# Altium PCB ДФТВ.434519.003.101.PcbDoc (part 1 of 3)
Units mm, origin at the board's own origin, x right, y up, seen from the top; angles counter-clockwise.
Board outline 82.5 x 70 mm, 2 copper layers (Top Layer, Bottom Layer), stack 1.491 mm thick; 90 components, 67 nets, 446 pads, 341 vias.
Unrouted connection lines stored in the file: 55.
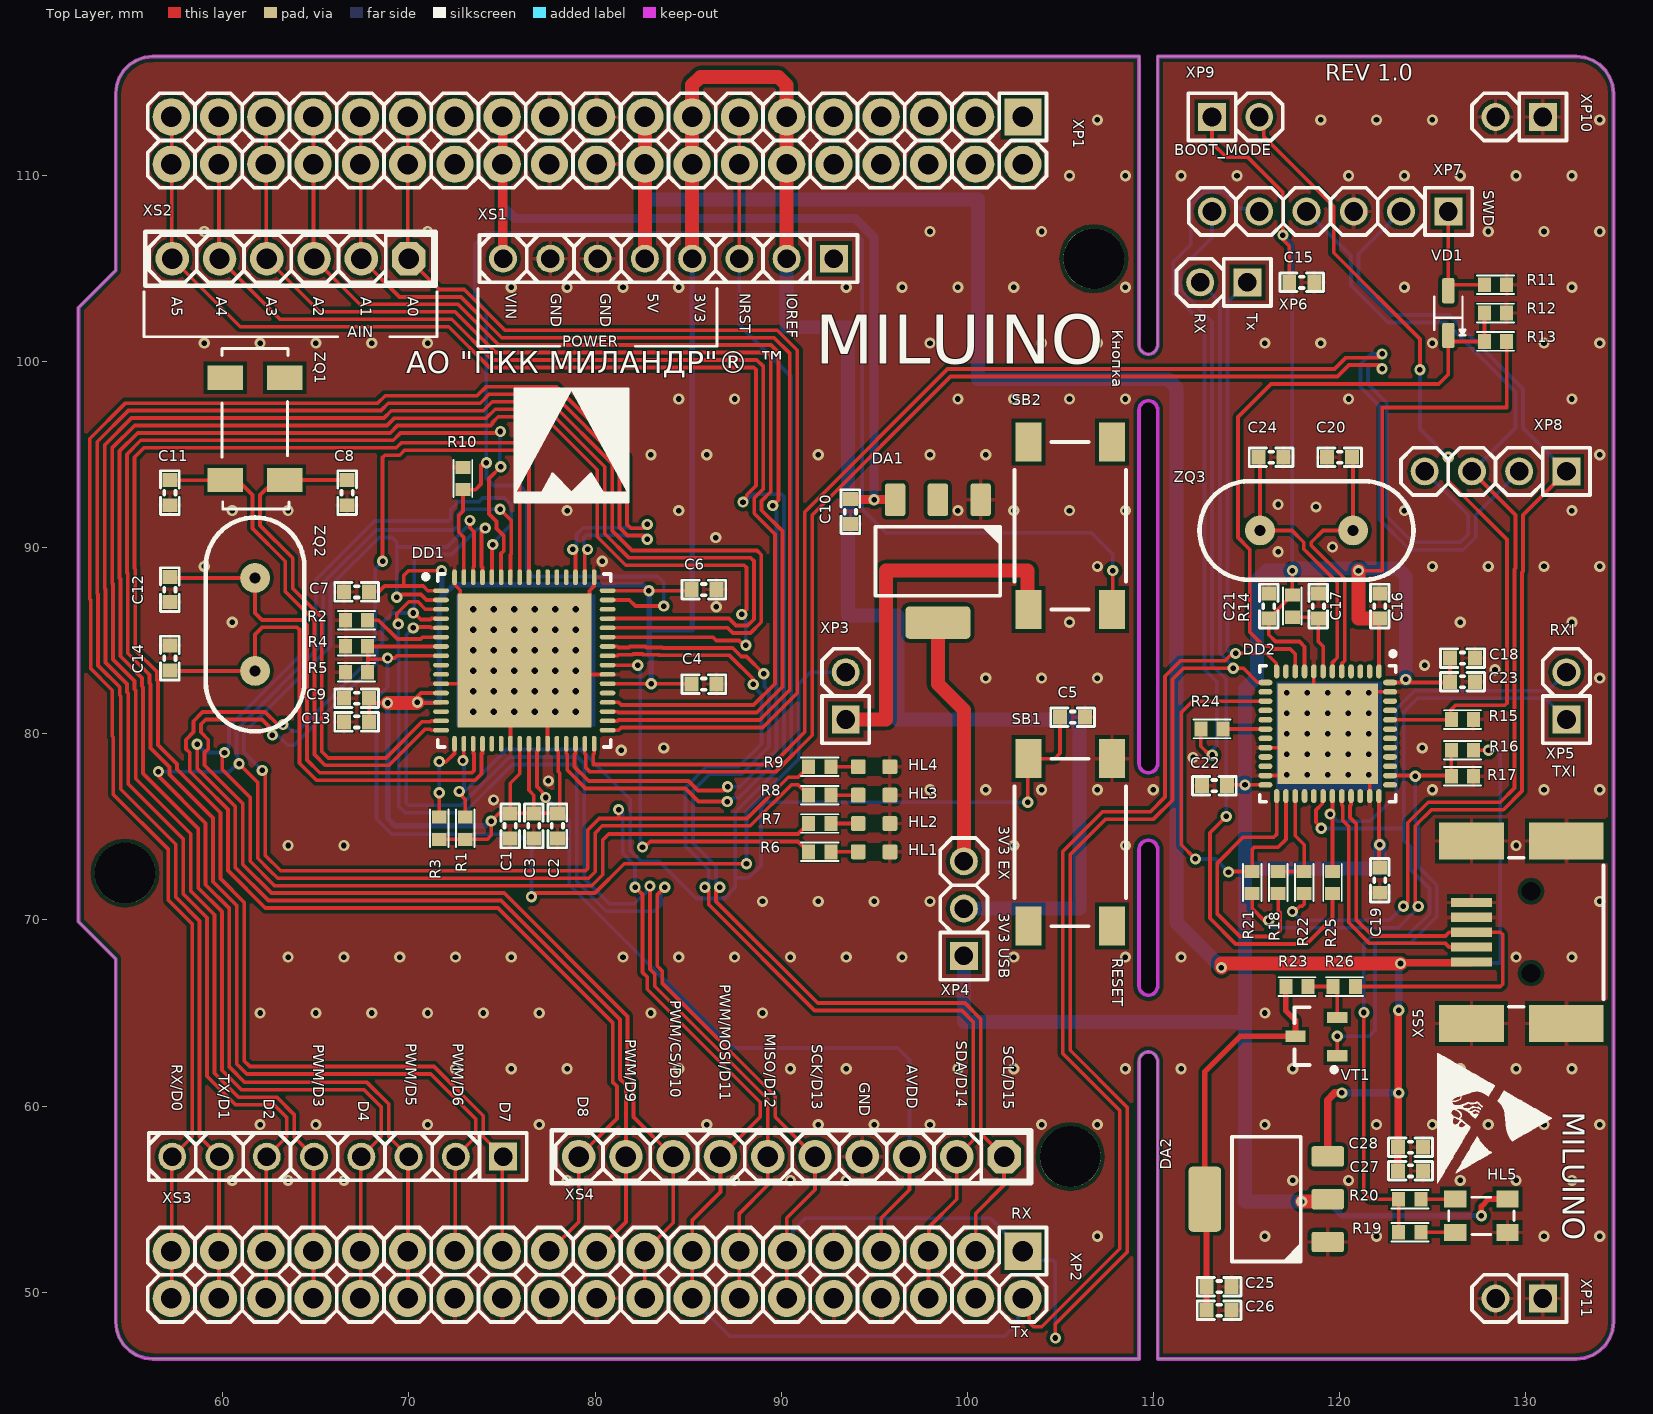
[diagram p0: Top Layer view]
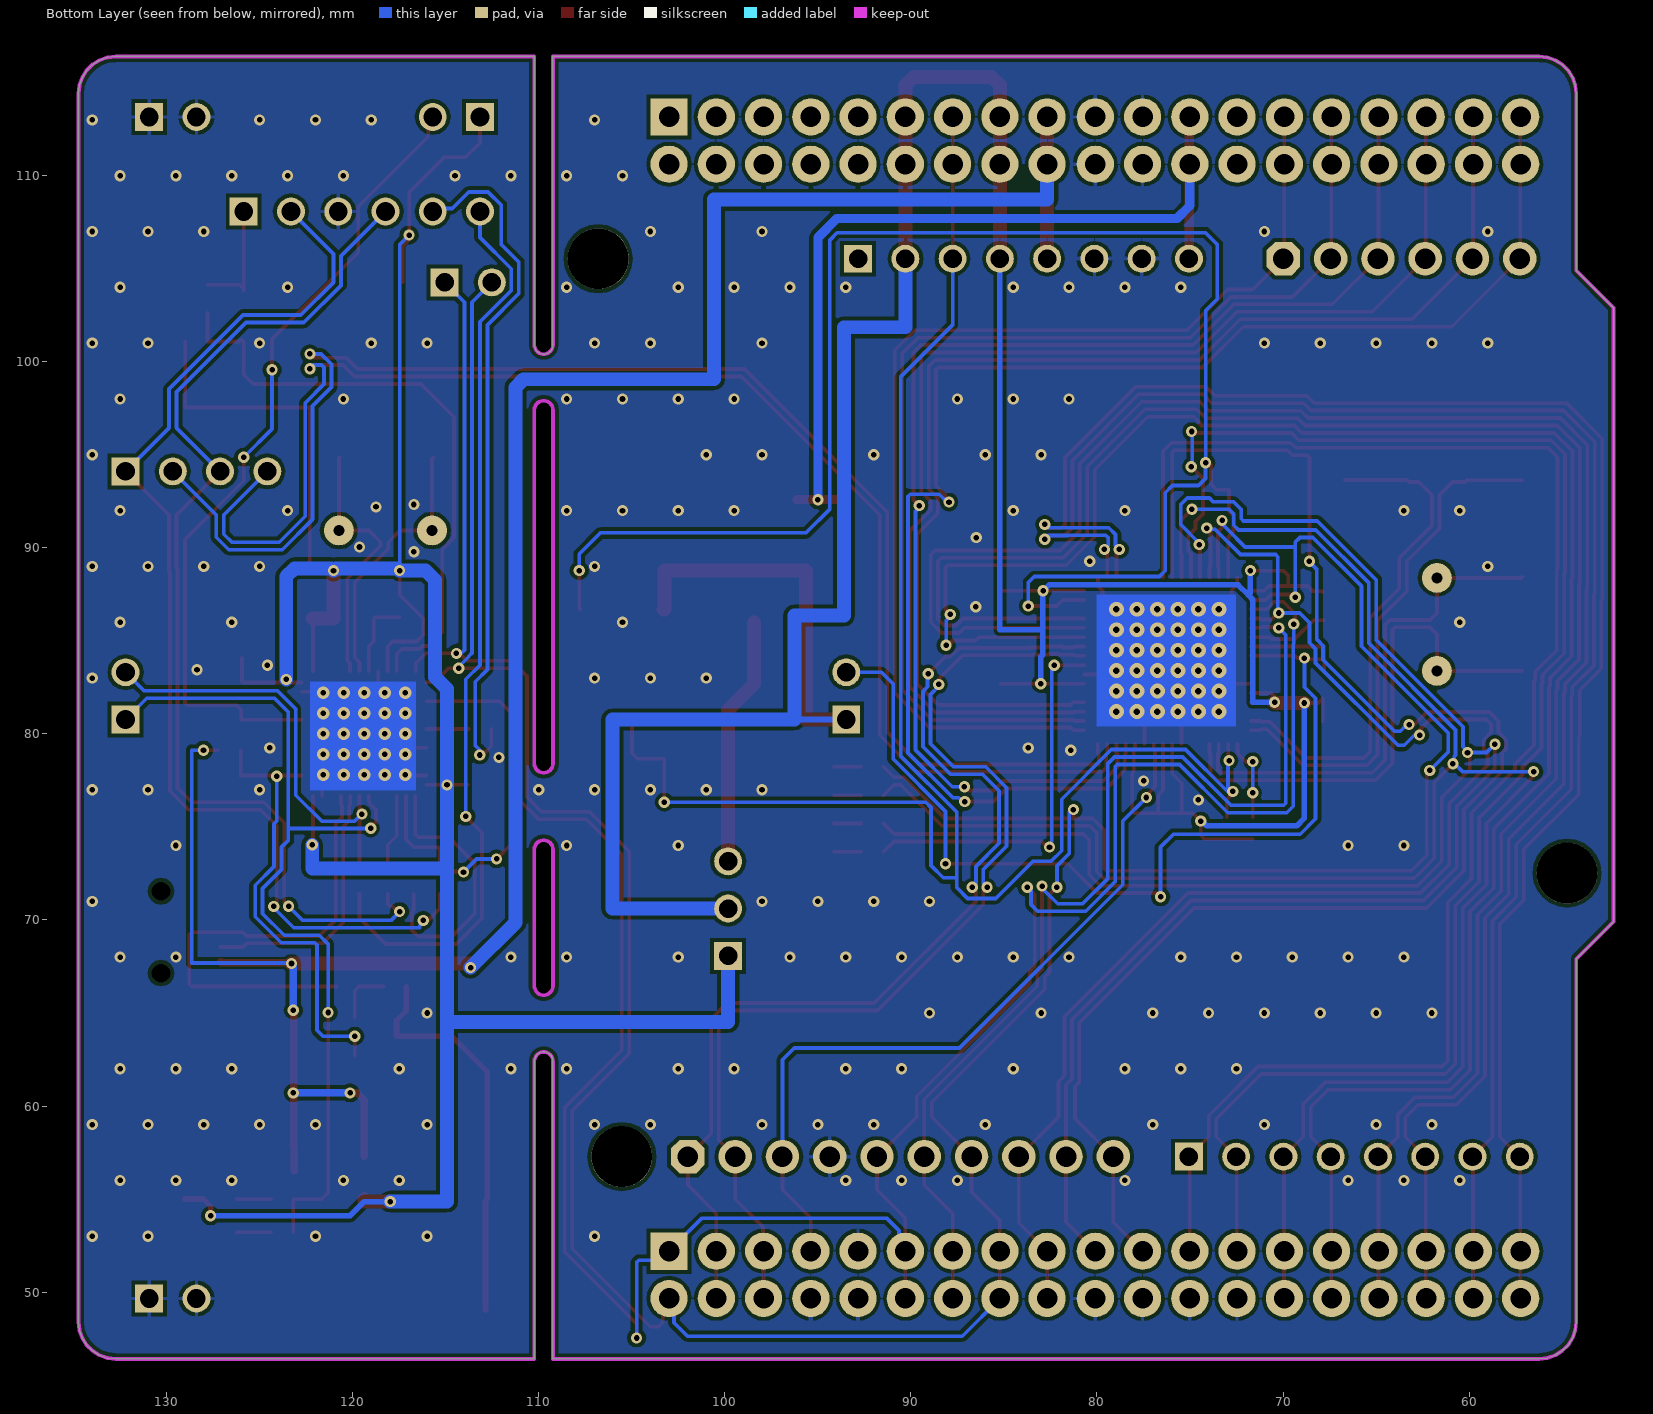
[diagram p1: Bottom Layer view, seen from below]
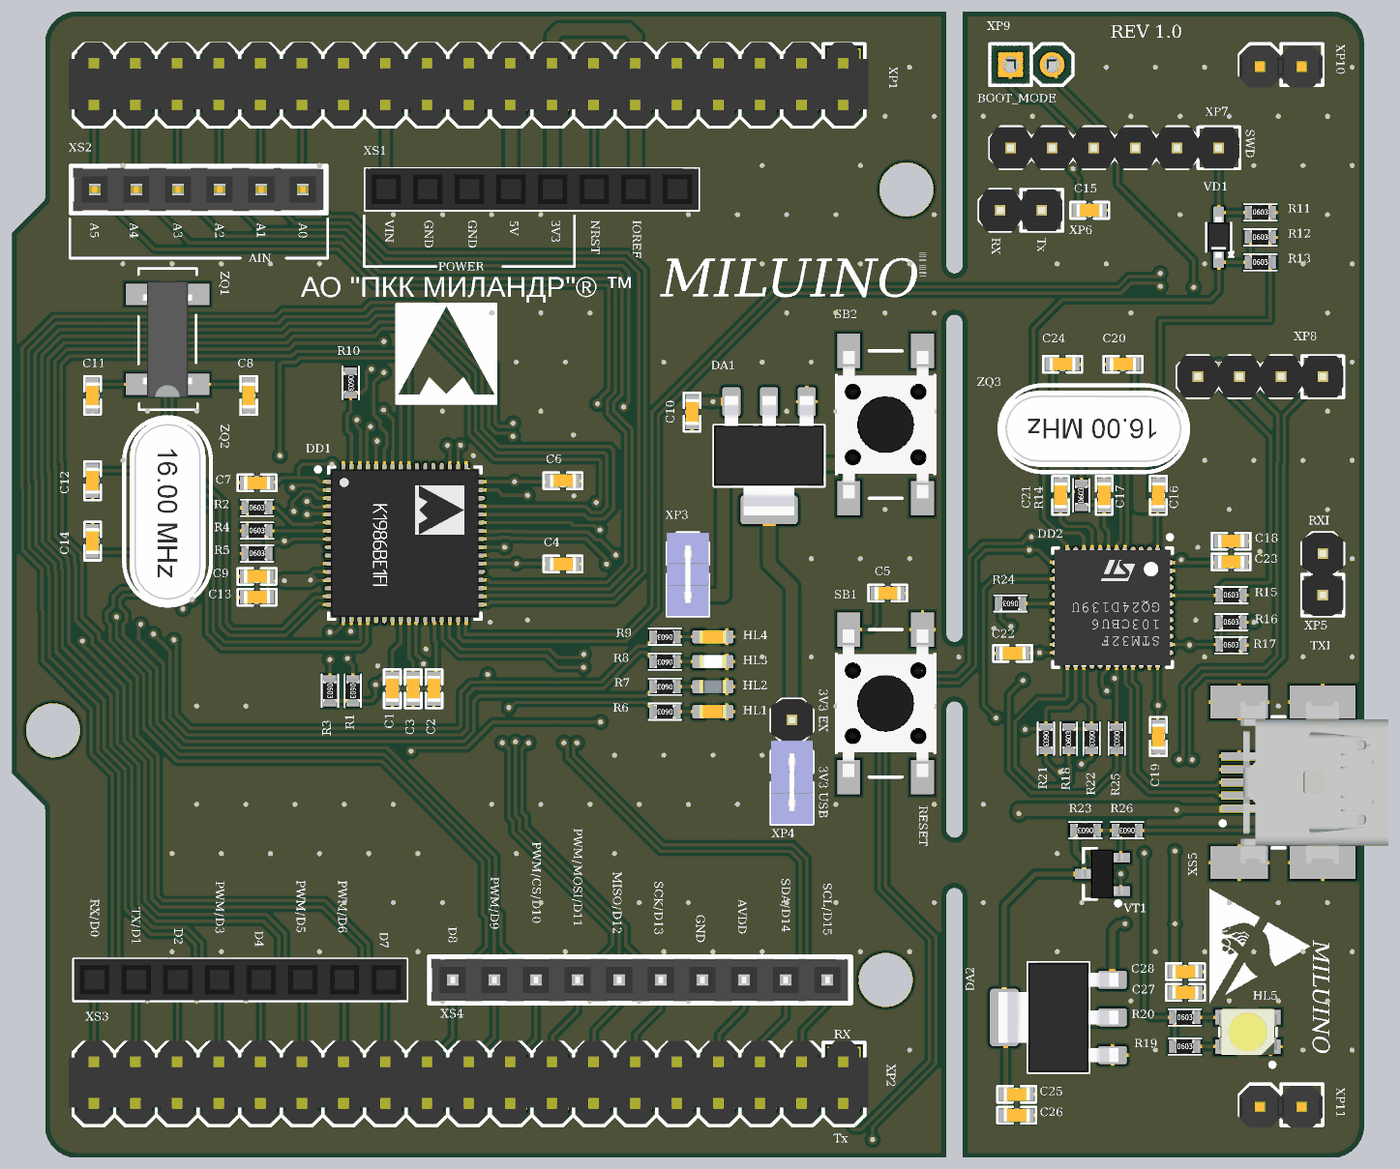
[diagram p3: 3D render of the assembled board from above, using the file's embedded part models]

## Layer stack, top to bottom
Top Solder: solder mask 0.0102, Solder Resist, Dk 3.5
Top Layer: signal copper 0.0356
Dielectric 1: dielectric 1.42, FR-4, Dk 4.8
Bottom Layer: signal copper 0.0356
Bottom Solder: solder mask 0.0102, Solder Resist, Dk 3.5

## Board outline
132.737,46.407 133.182,46.457 133.605,46.605 133.984,46.843 134.301,47.16 134.539,47.539 134.687,47.962 134.737,48.407 134.737,114.407 134.687,114.852 134.539,115.275 134.301,115.654 133.984,115.971 133.605,116.209 133.182,116.357 132.737,116.407 110.237,116.407 110.237,100.907 110.226,100.803 110.194,100.704 110.142,100.613 110.072,100.535 109.987,100.474 109.892,100.431 109.789,100.41 109.685,100.41 109.582,100.431 109.487,100.474 109.402,100.535 109.332,100.613 109.28,100.704 109.248,100.803 109.237,100.907 109.237,116.407 56.237,116.407 55.792,116.357 55.369,116.209 54.99,115.971 54.673,115.654 54.435,115.275 54.287,114.852 54.237,114.407 54.237,104.907 52.237,102.907 52.237,69.907 54.237,67.907 54.237,48.407 54.287,47.962 54.435,47.539 54.673,47.16 54.99,46.843 55.369,46.605 55.792,46.457 56.237,46.407 109.237,46.407 109.237,62.407 109.248,62.511 109.28,62.61 109.332,62.701 109.402,62.779 109.487,62.84 109.582,62.883 109.685,62.904 109.789,62.904 109.892,62.883 109.987,62.84 110.072,62.779 110.142,62.701 110.194,62.61 110.226,62.511 110.237,62.407 110.237,46.407
cut-out: 109.892,74.263 109.987,74.22 110.072,74.159 110.142,74.081 110.194,73.99 110.226,73.891 110.237,73.787 110.237,66.457 110.226,66.353 110.194,66.254 110.142,66.163 110.072,66.085 109.987,66.024 109.892,65.981 109.789,65.96 109.685,65.96 109.582,65.981 109.487,66.024 109.402,66.085 109.332,66.163 109.28,66.254 109.248,66.353 109.237,66.457 109.237,73.787 109.248,73.891 109.28,73.99 109.332,74.081 109.402,74.159 109.487,74.22 109.582,74.263 109.685,74.284 109.789,74.284
cut-out: 109.892,97.883 109.987,97.84 110.072,97.779 110.142,97.701 110.194,97.61 110.226,97.511 110.237,97.407 110.237,78.407 110.226,78.303 110.194,78.204 110.142,78.113 110.072,78.035 109.987,77.974 109.892,77.931 109.789,77.91 109.685,77.91 109.582,77.931 109.487,77.974 109.402,78.035 109.332,78.113 109.28,78.204 109.248,78.303 109.237,78.407 109.237,97.407 109.248,97.511 109.28,97.61 109.332,97.701 109.402,97.779 109.487,97.84 109.582,97.883 109.685,97.904 109.789,97.904

## Design rules (kind name [scope] priority, off if disabled: settings)
Clearance [All] p1: gap=0.2 ignorepadtopadclearanceinfootprint=FALSE
HoleSize [All] p1: absolutevalues=TRUE maxlimit=0.3 minlimit=0.3 maxpercent=80.000 minpercent=20.000
PlaneConnect [All] p1: planeconnectstyle=Relief reliefexpansion=0.5 reliefentries=4 reliefconductorwidth=0.2 reliefairgap=0.2
PolygonConnect [All] p1: connectstyle=Relief reliefconductorwidth=0.2 reliefentries=4 polygonreliefangle="90 Angle" airgapwidth=0.2
RoutingVias [All] p1: holewidth=0.3 width=0.6 viastyle="Through Hole" minholewidth=0.3 minwidth=0.6 maxholewidth=0.3 maxwidth=0.6 useviatemplates=TRUE viatemplateguid#1={6A73DFBB-D338-4014-9EBD-422A7596DFE0} viatemplatename#1=v60h30m0mx0(1)
SolderMaskExpansion [All] p1: expansion=0.1 istentingtop=FALSE
Width B2_Power [InNet('B2')] p1: maxlimit=0.5 minlimit=0.5 preferedwidth=0.5
Width Width_3,3В [InNet('+3,3В')] p2: maxlimit=0.75 minlimit=0.2 preferedwidth=0.3
Width Width_3,3В_In [InNet('+3,3В_In')] p3: maxlimit=0.75 minlimit=0.2 preferedwidth=0.3
Width Width_3,3В_Ex [InNet('+3,3В_Ex')] p4: maxlimit=0.75 minlimit=0.2 preferedwidth=0.3
Width Width_5В [InNet('+5В')] p5: maxlimit=0.75 minlimit=0.2 preferedwidth=0.4
Width [All] p6: maxlimit=0.2 minlimit=0.2 preferedwidth=0.2
28 further rules are at their usual default settings.

## Classes and differential pairs
component class "ДФТВ.434519.003 л.2 Э3": C15 C16 C17 C18 C19 C20 C21 C22 C23 C24 C25 C26 C27 C28 DA2 HL5 R11 R12 R13 R14 R15 R16 R17 R18 R19 R20 R21 R22 R23 R24 R25 R26 VD1 VT1 XP4 XP5 XP6 XP7 XP8 XP9 XP10 XP11 XS5 ZQ3
component class "ДФТВ.434519.003 л.1 Э3": C1 C2 C3 C4 C5 C6 C7 C8 C9 C10 C11 C12 C13 C14 DA1 HL1 HL2 HL3 HL4 R1 R2 R3 R4 R5 R6 R7 R8 R9 R10 SB1 SB2 XP1 XP2 XP3 XS1 XS2 XS3 XS4 ZQ1 ZQ2

## Components (designator, comment, footprint, x,y, rotation, side; value= is the part's Value field where it differs from the comment)
C1 "Конденсатор" SMD_C0603 75.438,75.057 r90 top value="0.1 мкФ"
C2 "Конденсатор" SMD_C0603 77.978,75.057 r90 top value="0.1 мкФ"
C3 "Конденсатор" SMD_C0603 76.708,75.057 r90 top value="0.1 мкФ"
C4 "Конденсатор" SMD_C0603 85.852,82.677 r180 top value="0.1 мкФ"
C5 "Конденсатор" SMD_C0603 105.664,80.899 r0 top value="0.1 мкФ"
C6 "Конденсатор" SMD_C0603 85.852,87.757 r180 top value="0.1 мкФ"
C7 "Конденсатор" SMD_C0603 67.183,87.63 r0 top value="0.1 мкФ"
C8 "Конденсатор" SMD_C0603 66.675,92.964 r90 top value="24 пФ"
C9 "Конденсатор" SMD_C0603 67.183,81.915 r0 top value="0.1 мкФ"
C10 "Конденсатор" SMD_C0603 93.726,91.948 r90 top value="0.1 мкФ"
C11 "Конденсатор" SMD_C0603 57.15,92.964 r90 top value="24 пФ"
C12 "Конденсатор" SMD_C0603 57.15,87.757 r90 top value="24 пФ"
C13 "Конденсатор" SMD_C0603 67.183,80.645 r0 top value="0.1 мкФ"
C14 "Конденсатор" SMD_C0603 57.15,84.074 r270 top value="24 пФ"
C15 "Конденсатор" SMD_C0603 117.983,104.267 r180 top value="0.1 мкФ"
C16 "Конденсатор" SMD_C0603 122.174,86.868 r270 top value="0.1 мкФ"
C17 "Конденсатор" SMD_C0603 118.872,86.868 r270 top value="0.1 мкФ"
C18 "Конденсатор" SMD_C0603 126.619,84.074 r180 top value="0.1 мкФ"
C19 "Конденсатор" SMD_C0603 122.174,72.136 r90 top value="0.1 мкФ"
C20 "Конденсатор" SMD_C0603 120.015,94.869 r0 top value="24 пФ"
C21 "Конденсатор" SMD_C0603 116.205,86.868 r270 top value="0.1 мкФ"
C22 "Конденсатор" SMD_C0603 113.284,77.216 r0 top value="0.1 мкФ"
C23 "Конденсатор" SMD_C0603 126.619,82.804 r180 top value="0.1 мкФ"
C24 "Конденсатор" SMD_C0603 116.332,94.869 r180 top value="24 пФ"
C25 "Конденсатор" SMD_C0603 113.538,50.292 r180 top value="0.1 мкФ"
C26 "Конденсатор" SMD_C0603 113.538,49.022 r180 top value="0.1 мкФ"
C27 "Конденсатор" SMD_C0603 123.825,56.515 r180 top value="0.1 мкФ"
C28 "Конденсатор" SMD_C0603 123.825,57.785 r180 top value="0.1 мкФ"
DA1 "Преобразователи напряжения" SOT223 98.425,89.281 r270 top
DA2 "Преобразователи напряжения" SOT223 116.078,54.991 r180 top
DD1 "Comment" MDR-QFN64_N 76.2,83.947 r0 top
DD2 "Comment" UFQFPN48 119.38,80.01 r270 top
HL1 "Светодиод" "DIODE: LED-0603-AMBER" 94.996,73.66 r0 top value="2.1 V"
HL2 "Светодиод" "DIODE: LED-0603-BLUE" 94.996,75.184 r0 top value="2.1 V"
HL3 "Светодиод" "DIODE: LED-0603-WHITE" 94.996,76.708 r0 top value="2.1 V"
HL4 "Светодиод" "DIODE: LED-0603-YELLOW" 94.996,78.232 r0 top value="2.1 V"
HL5 "Светодиод" "DIODE: LED 3528" 127.635,54.102 r0 top value="2.1 V"
R1 "Резистор" R0603 73.025,74.93 r270 top value="10 кОм"
R2 "Резистор" R0603 67.183,86.106 r0 top value="10 кОм"
R3 "Резистор" R0603 71.628,74.93 r270 top value="10 кОм"
R4 "Резистор" R0603 67.183,84.709 r0 top value="10 кОм"
R5 "Резистор" R0603 67.183,83.312 r0 top value="10 кОм"
R6 "Резистор" R0603 92.075,73.66 r180 top value="330 Ом"
R7 "Резистор" R0603 92.075,75.184 r180 top value="330 Ом"
R8 "Резистор" R0603 92.075,76.708 r180 top value="330 Ом"
R9 "Резистор" R0603 92.075,78.232 r180 top value="330 Ом"
R10 "Резистор" R0603 72.898,93.726 r270 top value="330 Ом"
R11 "Резистор" R0603 128.397,104.14 r0 top value="10 кОм"
R12 "Резистор" R0603 128.397,102.616 r0 top value="4.7 кОм"
R13 "Резистор" R0603 128.397,101.092 r0 top value="4.7 кОм"
R14 "Резистор" R0603 117.475,86.868 r90 top value="10 кОм"
R15 "Резистор" R0603 126.619,80.772 r0 top value="10 кОм"
R16 "Резистор" R0603 126.619,79.121 r0 top value="10 кОм"
R17 "Резистор" R0603 126.619,77.724 r0 top value="10 кОм"
R18 "Резистор" R0603 116.713,72.009 r90 top value="220 Ом"
R19 "Резистор" R0603 123.79,53.213 r0 top value=100
R20 "Резистор" R0603 123.79,54.991 r0 top value=100
R21 "Резистор" R0603 115.316,72.009 r270 top value="22 Ом"
R22 "Резистор" R0603 118.11,72.009 r270 top value="22 Ом"
R23 "Резистор" R0603 117.729,66.421 r180 top value="1.5 кОм"
R24 "Резистор" R0603 113.157,80.264 r180 top value="22 Ом"
R25 "Резистор" R0603 119.634,72.009 r270 top value="22 Ом"
R26 "Резистор" R0603 120.269,66.421 r180 top value="1.5 кОм"
SB1 "Переключатель" "BUT: 6x6 SMD" 105.537,74.168 r270 top
SB2 "Переключатель" "BUT: 6x6 SMD" 105.537,91.186 r90 top
VD1 "Диод Шоттки" "DIODE: SOD323F" 125.857,102.616 r90 top value="40 V"
VT1 "Транзистор" SOT23-3H 118.745,63.754 r180 top value=NPN
XP1 "Вилка" PLDH-38 92.837,111.887 r180 top value=Connector
XP2 "Вилка" PLDH-38 92.837,50.927 r180 top value=Connector
XP3 "Вилка" PLS-2-J 93.472,82.042 r90 top value=Connector
XP4 "Вилка" PLS-3-J 99.822,70.612 r90 top
XP5 "Вилка" PLS-2 132.207,82.042 r90 top value=Connector
XP6 "Вилка" PLS-2 113.792,104.267 r180 top value=Connector
XP7 "Вилка" PLS-6 119.507,108.077 r180 top value=Connector
XP8 "Вилка" PLS-4 128.397,94.107 r180 top value=Connector
XP9 "Вилка" PLS-2 114.427,113.157 r0 top value=Connector
XP10 "Вилка" PLH-2#1 129.667,113.157 r180 top value=Connector
XP11 "Вилка" PLH-2#2 129.667,49.657 r180 top value=Connector
XS1 "Розетка" PBS-8 83.947,105.537 r180 top value=Connector
XS2 "Розетка" PBS-6 63.627,105.537 r180 top value=Connector
XS3 "Розетка" PBS-8 66.167,57.277 r180 top value=Connector
XS4 "Розетка" PBS-10 90.551,57.277 r180 top value=Connector
XS5 "Розетка" USB_MINI_Type_b 127.102,69.342 r180 top value=Connector
ZBOAS162092470 "Comment" "BOASVIEWbasic:Ocновной вид платы:2:1:0:0" 41.148,2348.738 r0 top (schematic designator fewf)
ZBOAS169591295 "Comment" "BOASVIEWside:Вид платы сверху:2:0:0:0" 43.053,2318.893 r0 top
ZBOAS1837092440 "Comment" "BOASVIEWassembly:Вид спереди для сборочного:2:1:0:Основное исполнение:101" 466.598,2347.976 r0 top
ZBOAS1843090160 "Comment" "BOASVIEWassboky:Вид сверху для сборочного чертежа:2:0:0:101" 468.122,2290.064 r0 top
ZQ1 "Кварцевые резонаторы" DSO-N4 61.722,96.393 r90 top value="32768 Hz"
ZQ2 "Кварцевые резонаторы" HC-49S 61.727,85.883 r270 top value="12 MHz"
ZQ3 "Кварцевые резонаторы" HC-49S 118.237,90.932 r180 top value="12 MHz"

## Footprints (in the part's own frame and the unit in brackets; to place one, negate y for a bottom-side part, rotate by r counter-clockwise, add the part's x,y. Pads: shape width x height; smd on the part's side, far side on the other; paste and mask are expansions set on the pad)
"BOASVIEWassboky:Вид сверху для сборочного чертежа:2:0:0:101" [mm]
"BOASVIEWassembly:Вид спереди для сборочного:2:1:0:Основное исполнение:101" [mm]
"BOASVIEWbasic:Ocновной вид платы:2:1:0:0" [mm]
"BOASVIEWside:Вид платы сверху:2:0:0:0" [mm]
"BUT: 6x6 SMD" [mm] "Leaded Tactile Button 6x6"
  rect 2.1x1.4 smd: 1(-4.5,2.25) 2(-4.5,-2.25) 3(4.5,-2.25) 4(4.5,2.25)
  silkscreen extent -4.5,-3 4.5,3, body extent -4.5,-3 4.5,3, height 4.3
"DIODE: LED 3528" [mm]
  rect 1.2x0.9 smd: 1(1.4,-0.9) 2(-1.4,-0.9) 3(-1.4,0.9) 4(1.4,0.9)
  round 0.5 on Top Overlay: ""(1.5,-2)
  round 0.5 on Mech3: ""(1.5,-2)
  silkscreen extent -1.75,-1 1.75,1, body extent -1.75,-1.4 1.75,1.4, height 1.9
"DIODE: LED-0603-AMBER" [mm]
  round 0.254 on Mech15: 0(0,0)
  rrect25% 0.8x0.8 smd: A(-0.85,0) K(0.85,0)
  Top Layer pour cut-out: -0.5,0.5 0.5,0.5 0.5,-0.5 -0.5,-0.5
  body extent -0.8,-0.4 0.8,0.4, height 0.75
"DIODE: LED-0603-BLUE" [mm]
  round 0.254 on Mech15: 0(0,0)
  rrect25% 0.8x0.8 smd: A(-0.85,0) K(0.85,0)
  Top Layer pour cut-out: -0.5,0.5 0.5,0.5 0.5,-0.5 -0.5,-0.5
  body extent -0.8,-0.4 0.8,0.4, height 0.75
"DIODE: LED-0603-WHITE" [mm]
  round 0.254 on Mech15: 0(0,0)
  rrect25% 0.8x0.8 smd: A(-0.85,0) K(0.85,0)
  Top Layer pour cut-out: -0.5,0.5 0.5,0.5 0.5,-0.5 -0.5,-0.5
  body extent -0.8,-0.4 0.8,0.4, height 0.75
"DIODE: LED-0603-YELLOW" [mm]
  round 0.254 on Mech15: 0(0,0)
  rrect25% 0.8x0.8 smd: A(-0.85,0) K(0.85,0)
  Top Layer pour cut-out: -0.5,0.5 0.5,0.5 0.5,-0.5 -0.5,-0.5
  body extent -0.8,-0.4 0.8,0.4, height 0.75
"DIODE: SOD323F" [mm] "SOD-323; 2 Leads; Body 2.7 x 1.6 mm, (LxW)"
  round 0.508 on Mech15: 0(0,0)
  rrect25% 1.35x0.65 smd: A(1.2,0) K(-1.2,0)
  silkscreen extent -1.19,-0.91 0.89,0.76, body extent -1.25,-0.67 1.25,0.68, height 1
DSO-N4 [mm] "Crystal, SM; 4 Leads; Body 8 x 3.8 x 2.5 mm (LxWxH) SMD08038P4"
  rect 1.3x1.9 smd: 1(-2.75,-1.6) 2(2.75,-1.6) 3(2.75,1.6) 4(-2.75,1.6)
  body extent -3.55,-1.55 3.55,1.55, height 1.5
HC-49S [mm] "HC49 Short Through-hole Mount Footprint"
  round 1.6 hole 0.6: 1(-2.5,0) 3(2.5,0)
  silkscreen extent -5.75,-2.65 5.75,2.65, body extent -5.65,-2.33 5.7,2.33, height 3.7
MDR-QFN64_N [mm] "QFN, 64-Leads, Body 9x9mm, Pitch 0.5mm, IPC Medium Density"
  rrect15% 1x1 smd: 0(-2.25,-2.25) 0(-2.25,0) 0(-2.25,2.25) 0(0,-2.25) 0(0,0) 0(0,2.25) 0(2.25,-2.25) 0(2.25,0) 0(2.25,2.25)
  oval 0.85x0.25 smd paste-0.025: 1(-4.475,3.75) 2(-4.475,3.25) 3(-4.475,2.75) 4(-4.475,2.25) 5(-4.475,1.75) 6(-4.475,1.25) 7(-4.475,0.75) 8(-4.475,0.25) 9(-4.475,-0.25) 10(-4.475,-0.75) 11(-4.475,-1.25) 12(-4.475,-1.75) 13(-4.475,-2.25) 14(-4.475,-2.75) 15(-4.475,-3.25) 16(-4.475,-3.75) 33(4.475,-3.75) 34(4.475,-3.25) 35(4.475,-2.75) 36(4.475,-2.25) 37(4.475,-1.75) 38(4.475,-1.25) 39(4.475,-0.75) 40(4.475,-0.25) 41(4.475,0.25) 42(4.475,0.75) 43(4.475,1.25) 44(4.475,1.75) 45(4.475,2.25) 46(4.475,2.75) 47(4.475,3.25) 48(4.475,3.75)
  oval 0.25x0.85 smd paste-0.025: 17(-3.75,-4.475) 18(-3.25,-4.475) 19(-2.75,-4.475) 20(-2.25,-4.475) 21(-1.75,-4.475) 22(-1.25,-4.475) 23(-0.75,-4.475) 24(-0.25,-4.475) 25(0.25,-4.475) 26(0.75,-4.475) 27(1.25,-4.475) 28(1.75,-4.475) 29(2.25,-4.475) 30(2.75,-4.475) 31(3.25,-4.475) 32(3.75,-4.475) 49(3.75,4.475) 50(3.25,4.475) 51(2.75,4.475) 52(2.25,4.475) 53(1.75,4.475) 54(1.25,4.475) 55(0.75,4.475) 56(0.25,4.475) 57(-0.25,4.475) 58(-0.75,4.475) 59(-1.25,4.475) 60(-1.75,4.475) 61(-2.25,4.475) 62(-2.75,4.475) 63(-3.25,4.475) 64(-3.75,4.475)
  rect 7.2x7.2 smd paste-2539.97: 47(0,0)
  silkscreen extent -5.42,-4.65 4.65,4.65, body extent -4.52,-4.52 4.52,4.52, height 0.9
PBS-6 [mm] "PBS-6"
  oct 1.8x1.8 hole 1.1: 1(-6.35,0)
  round 1.8 hole 1.1: 2(-3.81,0) 3(-1.27,0) 4(1.27,0) 5(3.81,0) 6(6.35,0)
  silkscreen extent -7.8,-1.45 7.8,1.45, body extent -7.62,-1.27 7.62,1.27, height 8.4
PBS-8 [mm]
  rect 1.5x1.5 hole 1: 1(-8.89,0)
  round 1.5 hole 1: 2(-6.35,0) 3(-3.81,0) 4(-1.27,0) 5(1.27,0) 6(3.81,0) 7(6.35,0) 8(8.89,0)
  silkscreen extent -10.16,-1.27 10.16,1.27, body extent -10.16,-1.29 10.16,1.25, height 8.5
PBS-10 [mm] "PBS-10"
  oct 1.8x1.8 hole 1.1: 1(-11.43,0)
  round 1.8 hole 1.1: 2(-8.89,0) 3(-6.35,0) 4(-3.81,0) 5(-1.27,0) 6(1.27,0) 7(3.81,0) 8(6.35,0) 9(8.89,0) 10(11.43,0)
  silkscreen extent -12.88,-1.43 12.87,1.43, body extent -12.7,-1.27 12.7,1.27, height 8.4
PLDH-38 [mm]
  rect 2x2 hole 1.1: 1(-10.16,-1.27)
  round 2 hole 1.1: 2(-10.16,1.27) 3(-7.62,-1.27) 4(-7.62,1.27) 5(-5.08,-1.27) 6(-5.08,1.27) 7(-2.54,-1.27) 8(-2.54,1.27) 9(0,-1.27) 10(0,1.27) 11(2.54,-1.27) 12(2.54,1.27) 13(5.08,-1.27) 14(5.08,1.27) 15(7.62,-1.27) 16(7.62,1.27) 17(10.16,-1.27) 18(10.16,1.27) 19(12.75,-1.27) 20(12.75,1.27) 21(15.29,-1.27) 22(15.29,1.27) 23(17.83,-1.27) 24(17.83,1.27) 25(20.37,-1.27) 26(20.37,1.27) 27(22.91,-1.27) 28(22.91,1.27) 29(25.45,-1.27) 30(25.45,1.27) 31(27.99,-1.27) 32(27.99,1.27) 33(30.53,-1.27) 34(30.53,1.27) 35(33.07,-1.27) 36(33.07,1.27) 37(35.61,-1.27) 38(35.61,1.27)
  silkscreen extent -11.43,-2.54 36.88,2.54, body extent -11.65,-2.63 37.15,2.45, height 8.64
PLH-2#1 [mm]
  rect 1.5x1.5 hole 1: 1(-1.27,0)
  round 1.5 hole 1: ""(1.27,0)
  silkscreen extent -2.54,-1.27 2.54,1.27, body extent -2.52,-1.15 2.56,1.39, height 8.7
PLH-2#2 [mm]
  rect 1.5x1.5 hole 1: 1(-1.27,0)
  round 1.5 hole 1: 2(1.27,0)
  silkscreen extent -2.54,-1.27 2.54,1.27, body extent -2.52,-1.15 2.56,1.39, height 8.7
PLS-2 [mm]
  rect 1.5x1.5 hole 1: 1(-1.27,0)
  round 1.5 hole 1: 2(1.27,0)
  silkscreen extent -2.54,-1.27 2.54,1.27, body extent -2.54,-1.27 2.54,1.27, height 8.9
PLS-2-J [mm]
  rect 1.5x1.5 hole 1: 1(-1.27,0)
  round 1.5 hole 1: 2(1.27,0)
  silkscreen extent -2.54,-1.27 2.54,1.27, body extent -2.54,-1.27 2.54,1.27, height 9.45
PLS-3-J [mm]
  rect 1.5x1.5 hole 1: 1(-2.54,0)
  round 1.5 hole 1: 2(0,0) 3(2.54,0)
  silkscreen extent -3.83,-1.27 3.79,1.27, body extent -3.81,-1.27 3.81,1.27, height 9.45
PLS-4 [mm]
  rect 1.5x1.5 hole 1: 1(-3.81,0)
  round 1.5 hole 1: 2(-1.27,0) 3(1.27,0) 4(3.81,0)
  silkscreen extent -5.08,-1.27 5.08,1.27, body extent -5.08,-1.27 5.08,1.27, height 8.9
PLS-6 [mm]
  rect 1.5x1.5 hole 1: 1(-6.35,0)
  round 1.5 hole 1: 2(-3.81,0) 3(-1.27,0) 4(1.27,0) 5(3.81,0) 6(6.35,0)
  silkscreen extent -7.64,-1.27 7.6,1.27, body extent -7.62,-1.27 7.62,1.27, height 8.9
R0603 [mm] "1608M"
  rect 0.7x0.8 smd: 1(-0.6,0) 2(0.6,0)
  silkscreen extent -1,-0.5 1,0.5, body extent -0.8,-0.4 0.8,0.4, height 0.43
SMD_C0603 [mm]
  rect 0.75x0.8 smd: 1(-0.675,0) 2(0.675,0)
  silkscreen extent -1.18,-0.5 1.17,0.5, body extent -0.8,-0.4 0.8,0.4, height 0.9
SOT23-3H [mm]
  rect 1.1x0.6 smd: 1(-1.145,1.05) 2(-1.145,-1) 3(1.1,0)
  silkscreen extent -1.1,-1.55 1.15,1.92, body extent -1.27,-1.5 1.27,1.5, height 1.1
SOT223 [mm] "SOT223 /SC-73"
  round 1 on Mech15: 0(0,0)
  rrect25% 1.75x1.1 smd: 1(-3.3,2.3) 2(-3.3,0) 3(-3.3,-2.3)
  rrect25% 1.75x3.5 smd: 2(3.3,0)
  silkscreen extent -1.85,-3.35 1.85,3.35, body extent -3.65,-3.35 3.65,3.35, height 1.8
UFQFPN48 [mm]
  rrect25% 0.75x0.75 smd: 0(-2,2) 0(-2,-0.65) 0(-2,0.65) 0(-2,-2) 0(-0.65,2) 0(-0.65,0.65) 0(-0.65,-0.65) 0(-0.65,-2) 0(0.65,0.65) 0(0.65,2) 0(0.65,-2) 0(0.675,-0.65) 0(2,2) 0(2,-0.65) 0(2,0.65) 0(2,-2)
  oval 0.75x0.3 smd paste-0.025: 1(-3.35,2.75) 2(-3.35,2.25) 3(-3.35,1.75) 4(-3.35,1.25) 5(-3.35,0.75) 6(-3.35,0.25) 7(-3.35,-0.25) 8(-3.35,-0.75) 9(-3.35,-1.25) 10(-3.35,-1.75) 11(-3.35,-2.25) 12(-3.35,-2.75) 25(3.35,-2.75) 26(3.35,-2.25) 27(3.35,-1.75) 28(3.35,-1.25) 29(3.35,-0.75) 30(3.35,-0.25) 31(3.35,0.25) 32(3.35,0.75) 33(3.35,1.25) 34(3.35,1.75) 35(3.35,2.25) 36(3.35,2.75)
  oval 0.3x0.75 smd paste-0.025: 13(-2.75,-3.35) 14(-2.25,-3.35) 15(-1.75,-3.35) 16(-1.25,-3.35) 17(-0.75,-3.35) 18(-0.25,-3.35) 19(0.25,-3.35) 20(0.75,-3.35) 21(1.25,-3.35) 22(1.75,-3.35) 23(2.25,-3.35) 24(2.75,-3.35) 37(2.75,3.35) 38(2.25,3.35) 39(1.75,3.35) 40(1.25,3.35) 41(0.75,3.35) 42(0.25,3.35) 43(-0.25,3.35) 44(-0.75,3.35) 45(-1.25,3.35) 46(-1.75,3.35) 47(-2.25,3.35) 48(-2.75,3.35)
  rect 5.4x5.4 smd paste-2539.97: 47(0,0)
  silkscreen extent -4.42,-3.65 3.65,3.65, body extent -3.58,-3.57 3.58,3.58, height 0.75
USB_MINI_Type_b [mm] "1734035-1 (Te Connectivity)"
  rect 4x2 smd: 0(-5.1,4.9) 0(-5.1,-4.9)
  rect 3.5x2 smd: 0(0,4.9) 0(0,-4.9)
  rect 2.2x0.5 smd paste-0.025: 1(0,1.6) 2(0,0.8) 3(0,0) 4(0,-0.8) 5(0,-1.6)
  round 0 hole 1: ""(-3.2,2.2) ""(-3.2,-2.2)
  round 0.5 on Mech1: ""(-0.6,4.5)
  round 0.5 on Top Overlay: ""(1,2.5)
  silkscreen extent -7.1,-4 -2,4, body extent -9.1,-4.95 -0.1,4.95, height 3.95

## Part data
C1 C2 C3 C4 C5 C6 C7 C8 C9 C10 C11 C12 C13 C14 C15 C16 C17 C18 C19 C20 C21 C22 C23 C24 C25 C26 C27 C28: library part "Конденсаторы керамические", "АДПК.673511.021 ТУ", Category=Конденсатор, Distributer="АО НИИ \"Гириконд\"", Model=CL21B104JBCNNNC, Product Code="34 1469", Published=18.05.2019, Publisher="АО НПО \"КАДЕТЕК\"", TU/GOST="АДПК.673511.021 ТУ"
  C1 C2 C3 C4 C5 C6 C7 C9 C10 C13 C15 C16 C17 C18 C19 C21 C22 C23 C25 C26 C27 C28: Component Name="К10-79-10В-0,1 мкФ±20%-Н90"
  C8 C11 C12 C14 C20 C24: Component Name="К10-79-100В-24 пФ±5%-МП0"
DA1 DA2: library part AMS1117-3.3, "фирма Advanced Monolithic System", Category="Преобразователи напряжения", Component Name=AMS1117-3.3, Distributer="ЗАО \"Чип и Дип\"", Model=AMS1117-3.3, Product Code="63 3300", TU/GOST="фирма Advanced Monolithic System"
HL1 HL2 HL4: library part Светодиоды, "фирма Kingbright Elec. Co., Ltd", Category=Светодиод, Distributer="ООО \"ДКО \"Электронщик\"", LatestRevisionDate=17-Jul-2002, LatestRevisionNote="Re-released for DXP Platform.", Model=BL-L2506URC, PackageReference=PIN2, Product Code="63 1000", Published=24-Mar-1999, Publisher="Altium Limited", TU/GOST="фирма Kingbright Elec. Co., Ltd"
  HL1: Component Name=KPT-1608SECK
  HL2: Component Name=KPG-1608QBC-D
  HL4: Component Name=KPT-1608SYC
HL3: library part Светодиоды, "фирма Ningbo Foryard", Category=Светодиод, Component Name=FYLS-0603UWC, Distributer="ООО \"ДКО \"Электронщик\"", LatestRevisionDate=17-Jul-2002, LatestRevisionNote="Re-released for DXP Platform.", Model=BL-L2506URC, PackageReference=PIN2, Product Code="63 1000", Published=24-Mar-1999, Publisher="Altium Limited", TU/GOST="фирма Ningbo Foryard"
HL5: library part Светодиоды_сдвоенные, "фирма Kingbright", Category=Светодиод, Component Name=KAA-3528ESGC, Distributer="ЗАО \"Чип и Дип\"", LatestRevisionDate=17-Jul-2002, LatestRevisionNote="Re-released for DXP Platform.", Model=KAA-3528ESGC, PackageReference=PIN2, Product Code="63 1000", Published=24-Mar-1999, Publisher="Altium Limited", TU/GOST="фирма Kingbright"
R1 R2 R3 R4 R5 R6 R7 R8 R9 R10 R11 R12 R13 R14 R15 R16 R17 R18 R19 R20 R21 R22 R23 R24 R25 R26: library part "Резисторы без указания рассеиваемой мощности", "АЛЯР. 434110.005 ТУ", Category=Резистор, Distributer="ЗАО \"Чип и Дип\"", LatestRevisionDate=17-Jul-2002, LatestRevisionNote="Re-released for DXP Platform.", Model=R0603, PackageDescription="Axial Device, Thru-Hole; 2 Leads; 0.4 in Pin Spacing", PackageReference=AXIAL-0.4, Product Code="61 9900", Published=8-Jun-2000, Publisher="SPA CADETECH JSC", TU/GOST="АЛЯР. 434110.005 ТУ"
  R1 R2 R3 R4 R5 R11 R14 R15 R16 R17: Component Name="Р1-12-0,1-10 кОм ±5%-М-\"А\""
  R6 R7 R8 R9 R10: Component Name="Р1-12-0,1-330 Ом ±5%-М-\"А\""
  R12 R13: Component Name="Р1-12-0,1-4.7 кОм ±5%-М-\"А\""
  R18: Component Name="Р1-12-0,1-220 Ом ±5%-М-\"А\""
  R19 R20: Component Name="Р1-12-0,1-100 Ом ±5%-М-\"А\""
  R21 R22 R24 R25: Component Name="Р1-12-0,1-22 Ом ±5%-М-\"А\""
  R23 R26: Component Name="Р1-12-0,1-1.5 кОм ±5%-М-\"А\""
SB1 SB2: library part BT-02x-01p_S, "фирма KLS electronic co ltd", Component Name=KLS7-TS6604-7.0-180-B(Т), Distributer="ЗАО \"Чип и Дип\"", Product Code="34 6422", Published=17.04.2014, Publisher="Andrew Danich", TU/GOST="фирма KLS electronic co ltd", Type=Переключатель
VD1: library part "Диоды Шоттки", "фирма ST Microelectronics", Category="Диод Шоттки", Component Name=BAT60JFILM, Distributer="ООО \"ДКО \"Электронщик\"", Model="BAT60JFILM SOD323F", Product Code="63 1000", Rule=Undefined, TU/GOST="фирма ST Microelectronics"
VT1: library part "Биполярный NPN", "фирма Nexperia", Category=Транзистор, Characteristic="45В, 0.1А, 0.25Вт, 100МГц, h21e=450", Component Name=BC850B,215, Distributer="ЗАО \"Чип и Дип\"", Model=КТ3102БМ, Product Code="63 1000", Published=20.04.2021, Publisher="АО \"НПО КАДЕТЕК\"", TU/GOST="фирма Nexperia", Type=Транзистор
XP1 XP2: library part "Вилка 38 контактов вар. 2", "фирма Connfly electronic (Zhenqin)", Category=Вилка, Component Name="DS-1029-04 - 2x38", Distributer="ЗАО \"Чип и Дип\"", Model=PLD-38, Product Code="66 7250", Published=07.03.2013, Publisher="Andrew Danich", TU/GOST="фирма Connfly electronic (Zhenqin)", Type=Вилка
XP3 XP5 XP6 XP9: library part "Вилка 2 контакта вар. 2", "фирма Connfly electronic (Zhenqin)", Category=Вилка, Component Name=DS1021-1x2, Distributer="ЗАО \"Чип и Дип\"", Model=MW-2M, Product Code="34 6430", Published=07.03.2013, Publisher="Andrew Danich", TU/GOST="фирма Connfly electronic (Zhenqin)", Type=Вилка
XP4: library part "Вилка 3 контакта вар. 2", "фирма Connfly electronic (Zhenqin)", Category=Вилка, Component Name=DS1021-1x3, Distributer="ЗАО \"Чип и Дип\"", Model="СНП346-3ВП21-1 (PLS-3)", Product Code="34 6430", Published=07.03.2013, Publisher="Andrew Danich", TU/GOST="фирма Connfly electronic (Zhenqin)", Type=Вилка
XP7: library part "Вилка 6 контактов вар. 2", "фирма Connfly electronic (Zhenqin)", Category=Вилка, Component Name=DS1021-1x6, Distributer="Завод \"Электродеталь\"", Model=PLS-6, Product Code="34 6430", Published=07.03.2013, Publisher="Andrew Danich", TU/GOST="фирма Connfly electronic (Zhenqin)", Type=Вилка
XP8: library part "Вилка 4 контакта вар. 2", "фирма Connfly electronic (Zhenqin)", Category=Вилка, Component Name=DS1021-1x4, Distributer="ЗАО \"Чип и Дип\"", Model=PLS-4, Product Code="34 6430", Published=07.03.2013, Publisher="Andrew Danich", TU/GOST="фирма Connfly electronic (Zhenqin)", Type=Вилка
XP10 XP11: library part "Вилка 2 контакта вар. 2", "Connfly electronic (Zhenqin)", Category=Вилка, Component Name=DS1029-01, Distributer="ЗАО \"Чип и Дип\"", Model=PLH-2, Product Code="34 6430", Published=07.03.2013, Publisher="Andrew Danich", TU/GOST="Connfly electronic (Zhenqin)", Type=Вилка
XS1 XS3: library part "Розетка 8 контактов вар. 2", "фирма Connfly electronic (Zhenqin)", Category=Розетка, Component Name="DS-1023 -1x 8", Distributer="ЗАО \"Чип и Дип\"", Model=PBS-8, Product Code="66 7250", Published=07.03.2013, Publisher="Andrew Danich", TU/GOST="фирма Connfly electronic (Zhenqin)", Type=Розетка
XS2: library part "Розетка 6 контактов вар. 2", "фирма Connfly electronic (Zhenqin)", Category=Розетка, Component Name=DS1023-1x6, Distributer="ЗАО \"Чип и Дип\"", Model=PBS-6, Product Code="66 7250", Published=07.03.2013, Publisher="Andrew Danich", TU/GOST="фирма Connfly electronic (Zhenqin)", Type=Розетка
XS4: library part "Розетка 10 контактов вар. 2", "фирма Connfly electronic (Zhenqin)", Category=Розетка, Component Name=DS1023-1x10, Distributer="ЗАО \"Чип и Дип\"", Model=PBS-10, Product Code="66 7250", Published=07.03.2013, Publisher="Andrew Danich", TU/GOST="фирма Connfly electronic (Zhenqin)", Type=Розетка
XS5: library part "Розетка USB mini вар. 2", "фирма Te Connectivity", Category=Розетка, Component Name=1734035-1, Distributer="ООО \"ДКО \"Электронщик\"", Model="mini USB type B", Product Code="66 7250", Published=07.03.2013, Publisher="Andrew Danich", TU/GOST="фирма Te Connectivity", Type=Розетка
ZQ1 ZQ2 ZQ3: "КЖДГ.433513.017 ТУ", Alternating Manufacture="Chequers Electronic Limited", Category="Кварцевые резонаторы", Product Code="63 2100", Published=24.05.2021, Publisher="АО \"НПО КАДЕТЕК\"", Type=SMD07050C4
  ZQ1: Component Name="MC-206 32,768 кГц", Distributer="АО \"Завод \"Метеор\"", Model=SMD07050C4, TU/GOST="фирма EPSON"
  ZQ2: Component Name="РК415-5ДС-16М -3 (24 пФ)", Distributer="АО \"ПЬЕЗО\"", Model=HC49S, TU/GOST="ТУ 6321-002-72715118-2006"
  ZQ3: Component Name="РК415-5ДС-8М -3 (24 пФ)", Distributer="АО \"ПЬЕЗО\"", Model=HC49S, TU/GOST="ТУ 6321-002-72715118-2006"

## Free pads (board coordinates)
  round 3.272 hole 3.272: 1(54.737,72.517) 1(105.537,57.277) 1(106.807,105.537)

## Via types
v1: diameter 0.6, hole 0.3, Top Layer to Bottom Layer, tented both sides, 280 vias
v2: diameter 0.8, hole 0.35, Top Layer to Bottom Layer, tented bottom, 36 vias
v3: diameter 0.66, hole 0.3, Top Layer to Bottom Layer, tented both sides, 25 vias

## Nets (pads, with @x,y where several pads share a name; then routed paths per layer and width w, separated by ;. In a path a pad name is that pad's centre, name@x,y a point inside that pad or via, vN(x,y) a via of type N, cw(c..) or ccw(c..) an arc to the next point about the centre after c; other vN are vias at no path point)
+3,3В: C1.2 C2.2 C3.2 C4.2 C6.2 C7.2 C9.2 C13.2 R1.2 R3.2 SB2.1 XP1.11 XP1.12 XP1.15 XP1.16 XP3.1 XP4.2 XS1.2 XS1.4 | length 204.6
  Top Layer w0.2: C13.2@67.858,80.645 C9.2@67.858,81.915 68.112,81.661 v1(68.85,81.661) ; C7.2@67.858,87.63 67.9,87.672 68.416,87.672 68.69,87.947 69.726,87.947 ; v1@70.295,81.852 70.64,82.197 71.725,82.197 ; v1@70.45,81.661 71.689,81.661 71.725,81.697 ; R3.2@71.628,74.33 R1.2@73.025,74.33 74.203,74.33 74.422,74.549 v1(74.422,75.311) 74.843,75.732 C1.2@75.438,75.732 ; 71.725,87.697 71.011,87.697 70.761,87.947 69.726,87.947 ; v1(71.755,88.773) 69.977,88.773 69.726,88.522 69.726,87.947 ; 75.95,79.472 75.95,77.855 75.438,77.343 C1.2@75.438,75.732 ; 76.45,79.472 76.45,76.966 76.708,76.708 C3.2@76.708,75.732 ; 77.95,79.472 77.95,79.158 78.025,79.083 78.025,77.971 78.105,77.891 78.105,75.859 C2.2@77.978,75.732 C3.2@76.708,75.732 ; 80.675,82.697 85.157,82.697 C4.2@85.177,82.677 ; 80.675,87.697 v1(82.896,87.697) 85.117,87.697 C6.2@85.177,87.757 ; C1.2@75.438,75.732 C3.2@76.708,75.732
  Top Layer w0.75: v1(68.85,81.661) 70.414,81.661 v1(70.45,81.697) ; XS1.4@85.217,105.537 XP1.15@85.217,113.157 85.217,114.877 85.656,115.316 89.858,115.316 90.297,114.877 XP1.11@90.297,113.157 XP1.12@90.297,110.617 XS1.2@90.297,105.537 ; XP3.1@93.472,80.772 95.631,80.772 95.631,88.773 103.251,88.773 103.251,86.686 SB2.1@103.287,86.686
  Bottom Layer w0.3: v1(68.85,81.661) 68.85,75.471 69.264,75.057 74.096,75.057 74.35,75.311 v1(74.422,75.311) ; v1(70.45,81.697) 71.628,81.697 71.628,87.223 71.865,87.46 ; v1(71.755,88.773) 71.755,87.57 71.865,87.46 ; v1(83.023,82.697) 83.023,84.135 82.916,84.242 82.916,85.598 ; XS1.4@85.217,105.537 85.217,85.598 82.916,85.598 ; XP3.1@93.472,80.772 96.266,80.772 ; 71.865,87.46 72.416,88.011 82.57,88.011 82.884,87.697 82.916,87.697 82.916,85.598
  Bottom Layer w0.75: XS1.2@90.297,105.537 90.297,101.854 93.599,101.854 93.599,86.36 96.266,86.36 96.266,80.772 106.045,80.772 106.045,70.612 XP4.2@99.822,70.612
+3,3В_Ex: DA1.2 XP4.3 | length 13.4
  Top Layer w0.75: DA1.2@98.425,85.981 98.425,82.677 99.822,81.28 XP4.3@99.822,73.152
+3,3В_In: C15.2 C16.2 C18.2 C19.2 C21.2 C22.2 C23.2 C25.2 C26.2 DA2.2 HL5.4 R13.2 R14.2 R23.2 VT1.3 XP4.1 XP9.1 | length 188.8
  Top Layer w0.2: XP9.1@113.157,113.157 113.157,111.76 113.919,110.998 115.062,110.998 116.967,109.093 v1(116.967,106.807) 116.967,106.556 117.308,106.215 C15.2@117.308,104.267 ; C22.2@113.832,77.26 116.03,77.26 ; v1(117.475,88.773) R14.2@117.475,87.468 116.205,86.198 C21.2@116.205,86.193 116.205,85.332 116.574,84.963 117.856,84.963 118.13,84.689 118.13,83.36 ; v1(121.031,88.773) 122.301,88.773 122.301,97.536 128.997,97.536 R13.2@128.997,101.092 ; 122.13,76.66 122.13,72.855 C19.2@122.174,72.811 ; 122.13,83.36 122.13,86.087 cw(c122.28,86.087) C16.2@122.174,86.193 ; 122.73,82.76 125.838,82.76 ccw(c125.838,82.91) C23.2@125.944,82.804 C18.2@125.944,84.074
  Top Layer w0.3: C26.2@112.863,49.022 C25.2@112.863,50.292 112.863,54.906 DA2.2@112.778,54.991 112.778,61.851 114.681,63.754 VT1.3@117.645,63.754 117.645,64.6 117.129,65.116 R23.2@117.129,66.421 ; v1(117.983,54.864) 118.04,54.921 119.308,54.921 DA2.2@119.378,54.991 ; v1(127.635,54.102) 127.635,54.61 128.027,55.002 HL5.4@129.035,55.002
  Top Layer w0.75: v1(117.983,54.864) 119.378,54.864 DA2.2@119.378,54.991 ; v1(121.031,88.773) 121.031,86.193 C16.2@122.174,86.193
  Bottom Layer w0.2: v1(116.967,106.807) 117.475,106.299 v1(117.475,88.773)
  Bottom Layer w0.3: v1(117.983,54.864) 119.38,54.864 120.142,54.102 v1(127.635,54.102)
  Bottom Layer w0.75: XP4.1@99.822,68.072 99.822,64.516 114.935,64.516 ; v1(117.983,54.864) 114.935,54.864 114.935,64.516 ; v1(122.174,74.041) 122.174,72.771 114.935,72.771 ; v1(123.571,82.931) 123.571,88.461 123.132,88.9 121.158,88.9 v1(121.031,88.773) 120.904,88.9 117.602,88.9 v1(117.475,88.773) 116.078,88.773 115.57,88.265 115.57,83.058 114.935,82.423 114.935,77.26 114.935,72.771 ; 114.935,64.516 114.935,72.771
  other v1: 114.931,77.26
+5В: C27.2 C28.2 DA2.3 R16.2 XP1.17 XP1.18 XS1.5 XS5.1 | length 130.3
  Top Layer w0.2: R16.2@127.219,79.121 v1(128.016,79.121)
  Top Layer w0.4: DA2.3@119.378,57.291 119.378,60.323 119.761,60.706 v1(120.142,60.706) ; C27.2@123.15,56.515 C28.2@123.15,57.785 123.19,57.825 123.17,57.845 123.17,65.131 v1(123.19,65.151) ; v1(123.29,67.658) 123.328,67.697 127.057,67.697 XS5.1@127.102,67.742
  Top Layer w0.75: XS1.5@82.677,105.537 XP1.18@82.677,110.617 XP1.17@82.677,113.157 ; v1(113.665,67.437) 113.665,67.658 v1(123.29,67.658)
  Bottom Layer w0.2: v1(123.29,67.658) 123.323,67.691 128.651,67.691 128.651,79.121 v1(128.016,79.121)
  Bottom Layer w0.4: v1(120.142,60.706) v1(123.19,60.706) ; v1(123.19,65.151) 123.19,67.504 123.29,67.604 v1(123.29,67.658)
  Bottom Layer w0.75: XP1.18@82.677,110.617 82.677,108.712 100.584,108.712 100.584,99.06 110.813,99.06 111.252,98.621 111.252,69.85 v1(113.665,67.437)
A0: XP2.7 XS4.3 | length 41.4
  Top Layer w0.2: 76.95,79.472 76.95,79.158 76.875,79.083 76.875,77.176 77.182,76.869 77.182,76.85 77.343,76.689 v1(77.343,76.581) ; XP2.7@95.377,52.197 95.377,53.975 96.901,55.499 XS4.3@96.901,57.277
  Bottom Layer w0.2: v1(77.343,76.581) 78.613,75.311 78.613,71.894 87.388,63.119 96.266,63.119 96.901,62.484 XS4.3@96.901,57.277
A1: XP1.27 XP1.28 XS2.1 | length 60
  Top Layer w0.2: XP1.27@69.927,113.157 XP1.28@69.927,110.617 69.927,105.587 XS2.1@69.977,105.537 71.628,103.886 72.964,103.886 75.155,101.695 89.788,101.695 90.87,100.613 90.87,82.201 89.016,80.347 81.416,80.347 81.266,80.197 80.675,80.197
A2: XP1.29 XP1.30 XS2.2 | length 61.3
  Top Layer w0.2: XP1.29@67.387,113.157 67.412,113.132 67.412,110.617 67.412,105.562 XS2.2@67.437,105.537 69.488,103.486 72.799,103.486 74.99,101.295 89.622,101.295 90.47,100.447 90.47,82.367 88.85,80.747 81.25,80.747 81.2,80.697 80.675,80.697
A3: XP1.31 XP1.32 XS2.3 | length 69.8
  Top Layer w0.2: XP1.31@64.847,113.157 64.872,113.132 64.872,110.617 64.872,105.562 XS2.3@64.897,105.537 67.348,103.086 72.633,103.086 74.824,100.895 89.457,100.895 89.859,100.493 89.859,92.574 v1(89.551,92.266) ; 78.95,79.472 78.95,78.947 78.9,78.897 78.9,78.228 79.658,77.47 85.021,77.47 85.529,76.962 86.922,76.962 v1(87.122,77.162)
  Bottom Layer w0.2: v1(87.122,77.162) 87.772,77.162 89.751,79.141 89.751,91.958 89.551,92.158 v1(89.551,92.266)
A4: XP1.33 XP1.34 XS2.4 | length 65.3
  Top Layer w0.2: XP1.33@62.307,113.157 62.332,113.132 62.332,110.617 62.332,105.562 XS2.4@62.357,105.537 65.208,102.686 72.467,102.686 74.658,100.495 89.291,100.495 89.446,100.34 89.446,93.01 88.951,92.515 88.951,92.018 90.07,90.898 90.07,82.533 88.685,81.147 81.25,81.147 81.2,81.197 80.675,81.197
A5: XP1.35 XP1.36 XS2.5 | length 66.5
  Top Layer w0.2: XP1.35@59.767,113.157 59.792,113.132 59.792,110.617 59.792,105.562 XS2.5@59.817,105.537 63.068,102.286 72.302,102.286 74.493,100.095 88.695,100.095 89.046,99.744 89.046,93.175 88.551,92.68 88.551,91.852 89.67,90.733 89.67,82.698 88.519,81.547 81.416,81.547 81.266,81.697 80.675,81.697
A6: XP1.37 XP1.38 XS2.6 | length 80
  Top Layer w0.2: XP1.37@57.227,113.157 57.252,113.132 57.252,110.617 57.252,105.562 XS2.6@57.277,105.537 60.928,101.886 72.136,101.886 74.327,99.695 88.529,99.695 88.646,99.578 88.646,93.341 88.151,92.846 88.151,92.764 87.951,92.564 v1(87.951,92.456) ; 78.45,79.472 78.45,78.947 78.5,78.897 78.5,78.062 79.492,77.07 84.855,77.07 85.563,76.362 v1(87.104,76.362)
  Bottom Layer w0.2: v1(87.104,76.362) 87.23,76.362 87.43,76.562 87.738,76.562 90.151,78.975 90.151,92.759 90.034,92.876 88.479,92.876 88.059,92.456 v1(87.951,92.456)
B1: C5.1 R1.1 SB1.2 XP1.13 XP1.14 XS1.3 | length 94.4
  Top Layer w0.2: v1(72.701,76.91) 72.701,76.801 73.025,76.478 R1.1@73.025,75.53 ; 72.95,79.472 72.94,79.462 72.94,78.601 v1(72.9,78.561) v1@72.975,78.486 ; XS1.3@87.757,105.537 XP1.14@87.757,110.617 XP1.13@87.757,113.157 ; v1(103.251,76.327) 103.251,78.632 SB1.2@103.287,78.668 104.703,78.668 104.989,78.954 C5.1@104.989,80.899
  Bottom Layer w0.2: v1(72.701,76.91) v1@72.963,76.91 ; v1(72.9,78.561) 72.963,78.499 72.963,76.897 72.967,76.893 75.234,79.159 79.227,79.159 81.896,76.49 81.896,73.719 82.463,73.152 83.439,73.152 85.436,71.155 86.955,71.155 87.538,71.738 87.538,72.263 ; XS1.3@87.757,105.537 87.757,101.981 90.551,99.187 90.551,78.809 87.538,75.796 87.538,72.263 ; v1(103.251,76.327) 89.2,76.327 88.923,76.05 88.923,72.921 88.265,72.263 87.538,72.263
B2: C10.2 DA1.3 XP1.23 XP1.24 XS1.8 | length 47.4
  Top Layer w0.5: XP1.23@75.007,113.157 75.032,113.132 75.032,105.562 XS1.8@75.057,105.537 ; C10.2@93.726,92.623 93.747,92.602 96.104,92.602 DA1.3@96.125,92.581
  Bottom Layer w0.5: XS1.8@75.057,105.537 XS1.8@75.16,105.64 ; XP1.24@75.16,110.464 XP1.24@75.007,110.617 75.007,108.381 75.692,107.696 93.98,107.696 94.996,106.68 v1(94.996,92.583)
B3: R10.2 SB2.2 | length 92.1
  Top Layer w0.2: 72.95,88.422 72.95,90.56 72.676,90.835 72.676,91.744 72.898,91.966 R10.2@72.898,93.126 73.568,93.126 73.868,93.426 73.868,94.461 73.901,94.494 74.082,94.494 v1(74.158,94.571) ; 80.675,87.197 81.84,87.197 82.169,86.868 v1(83.693,86.868) ; SB2.2@107.787,86.686 107.823,86.722 v1(107.823,88.773)
  Bottom Layer w0.2: v1(83.693,86.868) 83.693,88.138 83.37,88.461 76.639,88.461 76.327,88.773 76.327,92.964 75.946,93.345 74.549,93.345 74.168,93.726 74.168,94.561 v1(74.158,94.571) 74.158,102.753 73.533,103.378 73.533,106.299 74.168,106.934 93.964,106.934 94.353,106.545 94.353,92.083 95.631,90.805 106.68,90.805 107.823,89.662 v1(107.823,88.773)
D1: XP2.3 XP2.4 XS4.1 | length 57.8
  Top Layer w0.2: 80.675,84.697 81.129,84.697 cw(c81.129,84.526) 81.25,84.647 81.836,84.647 81.882,84.693 82.71,84.693 82.756,84.647 83.605,84.647 83.632,84.62 87.396,84.62 87.856,84.16 88.139,84.16 v1(89.07,83.228) ; v1(86.706,71.755) 86.506,71.555 86.506,70.993 91.967,65.532 99.88,65.532 100.73,64.682 100.73,58.528 XS4.1@101.981,57.277 101.981,55.753 100.457,54.229 XP2.3@100.457,52.197 XP2.4@100.457,49.657
  Bottom Layer w0.2: v1(86.706,71.755) 86.506,71.955 86.506,72.879 85.258,74.127 85.258,76.946 86.145,77.832 87.877,77.832 89.351,79.306 89.351,82.284 89.105,82.53 89.105,83.194 v1(89.07,83.228)
D2: XP2.5 XP2.6 XS4.2 | length 56.8
  Top Layer w0.2: 80.675,84.197 81.129,84.197 ccw(c81.129,84.368) 81.25,84.247 82.001,84.247 82.047,84.293 82.545,84.293 82.591,84.247 83.439,84.247 83.466,84.22 87.23,84.22 88.505,82.945 v1(88.505,82.663) ; v1(85.906,71.755) 86.106,71.555 86.106,70.827 91.801,65.132 99.714,65.132 100.33,64.516 100.33,58.166 XS4.2@99.441,57.277 99.441,54.991 97.947,53.497 97.947,52.227 XP2.5@97.917,52.197 XP2.6@97.917,49.657
  Bottom Layer w0.2: v1(85.906,71.755) 86.106,71.955 86.106,72.713 84.858,73.961 84.858,77.111 85.979,78.232 87.711,78.232 88.951,79.472 88.951,82.118 88.505,82.564 v1(88.505,82.663)
D3: XP2.1 XP2.11 XP2.12 XP6.2 XS4.5 | length 152.8
  Top Layer w0.2: v1(69.424,85.897) 69.342,85.979 69.342,86.457 69.982,87.097 70.48,87.097 70.88,86.697 71.725,86.697 ; v1(83.75,71.755) 83.731,71.755 83.35,71.374 83.35,67.514 83.604,67.26 83.604,66.606 89.681,60.529 89.681,59.417 XS4.5@91.821,57.277 91.821,55.499 90.297,53.975 XP2.11@90.297,52.197 XP2.12@90.297,49.657 ; v1(104.74,47.533) 104.74,48.295 108.604,52.158 108.604,59.925 105.537,62.992 105.537,73.514 107.442,75.419 110.021,75.419 111.037,76.435 111.037,81.788 111.037,82.932 111.633,83.528 v1(114.3,83.528) 114.846,83.528 115.595,82.779 116.011,82.779 116.03,82.76
  Bottom Layer w0.2: v1(69.424,85.897) 69.424,84.841 69.45,84.815 69.45,76.112 69.801,75.761 72.967,75.761 75.565,78.359 78.896,78.359 79.013,78.242 79.013,72.059 80.606,70.466 83.189,70.466 83.55,70.827 83.55,71.555 v1(83.75,71.755) ; XP2.11@90.297,52.197 90.641,52.541 90.641,53.303 91.313,53.975 101.219,53.975 XP2.1@102.997,52.197 103.48,51.714 104.623,51.714 104.74,51.597 v1(104.74,47.533) ; XP6.2@112.522,104.267 113.592,103.197 113.592,84.343 113.763,84.172 113.763,84.143 114.3,83.606 v1(114.3,83.528)
D4: XP2.13 XP2.14 XS4.6 | length 58.1
  Top Layer w0.2: v1(70.231,85.697) 70.281,85.747 71.15,85.747 71.2,85.697 71.725,85.697 ; v1(82.95,71.823) 82.95,67.349 83.204,67.095 83.204,66.441 89.281,60.364 XS4.6@89.281,57.277 89.281,55.753 87.757,54.229 XP2.13@87.757,52.197 XP2.14@87.757,49.657
  Bottom Layer w0.2: v1(70.231,85.697) 69.85,85.316 69.85,76.278 69.967,76.161 72.801,76.161 75.399,78.759 79.062,78.759 79.413,78.408 79.413,78.135 79.413,72.225 80.772,70.866 82.11,70.866 82.75,71.506 82.75,71.514 82.95,71.714 v1(82.95,71.823)
D5: R9.2 XP2.2 XP2.15 XP2.16 XP6.1 XS4.7 | length 191.4
  Top Layer w0.2: v1(62.115,78.039) 62.268,77.886 62.268,73.483 63.107,72.644 79.493,72.644 79.61,72.761 79.61,74.842 80.225,75.457 81.28,75.457 ; v1(69.342,87.347) 69.45,87.347 69.6,87.497 70.645,87.497 70.945,87.197 71.725,87.197 ; v1(73.276,91.475) 73.276,91.083 73.5,90.859 73.5,88.997 73.45,88.947 73.45,88.422 ; v1(81.266,75.932) 81.28,75.917 81.28,75.457 ; v1(82.15,71.755) 82.169,71.755 82.55,71.374 82.55,67.183 82.804,66.929 82.804,66.275 88.881,60.198 88.881,59.417 XS4.7@86.741,57.277 86.741,55.372 85.217,53.848 XP2.15@85.217,52.197 XP2.16@85.217,49.657 ; R9.2@91.475,78.232 90.913,77.67 90.385,77.67 88.172,75.457 81.28,75.457 ; XP2.2@102.997,49.657 103.341,49.313 103.341,48.36 103.569,48.133 104.013,48.133 108.204,52.324 108.204,59.759 105.137,62.826 105.137,73.68 107.276,75.819 109.855,75.819 110.637,76.601 110.637,81.788 110.637,83.098 111.467,83.928 113.851,83.928 114.251,84.328 v1(114.427,84.328) 116.078,84.328 116.611,83.795 116.611,83.379 116.63,83.36
  Bottom Layer w0.2: v1(62.115,78.039) 61.125,79.029 61.125,80.048 65.786,84.709 65.786,87.942 68.405,90.56 69.088,90.56 69.342,90.306 69.342,90.043 ; v1(69.342,87.347) 69.342,90.043 ; v1(73.276,91.475) 73.276,91.288 73.002,91.014 73.002,91.007 72.038,90.043 69.342,90.043 ; v1(81.266,75.932) 81.374,75.932 81.491,75.814 81.496,75.814 81.496,73.554 82.15,72.9 v1(82.15,71.755) ; XP2.16@85.217,49.657 87.244,47.63 102.006,47.63 102.733,48.357 102.733,49.393 XP2.2@102.997,49.657 ; v1(114.427,84.328) 114.173,84.328 113.992,84.509 113.992,103.197 XP6.1@115.062,104.267
D6: XP2.17 XP2.18 XS4.8 | length 77.7
  Top Layer w0.2: v1(62.66,79.932) 62.66,80.215 62.103,80.772 59.074,80.772 58.82,80.518 58.82,80.084 59.214,79.691 59.214,79.193 59.014,78.993 59.014,78.318 59.903,77.429 61.068,76.264 61.068,72.986 62.61,71.444 75.114,71.444 81.744,64.814 81.744,61.624 82.061,61.307 82.061,59.417 XS4.8@84.201,57.277 84.201,53.721 XP2.17@82.677,52.197 XP2.18@82.677,49.657 ; v1(70.231,86.497) 70.28,86.497 70.63,86.147 71.15,86.147 71.2,86.197 71.725,86.197 ; 73.95,88.422 73.95,88.947 73.9,88.997 73.9,90.859 v1(74.1,91.059)
  Bottom Layer w0.2: v1(62.66,79.932) 62.943,79.932 63.49,79.385 63.822,79.385 68.25,83.813 68.25,84.565 68.58,84.895 68.58,85.979 69.098,86.497 v1(70.231,86.497) 70.279,86.545 70.279,89.526 70.396,89.643 72.292,89.643 73.641,90.991 74.032,90.991 v1(74.1,91.059)
D7: R7.2 XP2.19 XS4.9 | length 114.3
  Top Layer w0.2: v1(58.614,79.442) 58.614,78.152 59.42,77.346 60.668,76.098 60.668,72.821 62.445,71.044 74.948,71.044 81.344,64.648 81.344,61.458 81.661,61.141 XS4.9@81.661,57.277 81.661,53.771 XP2.19@80.087,52.197 ; v1(60.087,78.994) 60.087,78.918 59.963,78.794 59.963,78.086 61.468,76.581 61.468,73.152 62.776,71.844 79.824,71.844 80.41,72.43 80.41,74.299 80.733,74.622 90.913,74.622 R7.2@91.475,75.184 ; 74.45,88.422 74.46,88.432 74.46,90.13 v1(74.5,90.17)
  Bottom Layer w0.2: v1(58.614,79.442) 59.062,78.994 v1(60.087,78.994) ; v1@60.137,79.02 60.137,79.123 60.325,79.311 60.325,80.379 64.986,85.04 64.986,88.273 68.156,91.443 72.127,91.443 72.244,91.56 72.244,92.056 72.663,92.475 73.757,92.475 73.957,92.675 75.147,92.675 75.499,92.324 75.499,91.247 74.5,90.248 v1(74.5,90.17)
D8: XP2.21 XS4.10 | length 84.2
  Top Layer w0.2: v1(63.226,80.498) 62.943,80.498 62.269,81.172 58.908,81.172 58.42,80.684 58.42,80.097 58.014,79.691 58.014,79.193 58.214,78.993 58.214,77.987 58.937,77.263 60.268,75.933 60.268,72.655 62.279,70.644 74.783,70.644 80.944,64.483 80.944,61.292 81.178,61.058 81.178,59.334 XS4.10@79.121,57.277 79.121,53.771 XP2.21@77.547,52.197 ; v1(68.58,89.281) 68.58,94.86 68.697,94.977 69.499,94.977 69.772,95.25 75.829,95.25 75.946,95.133 75.946,94.615 75.95,94.611 75.95,88.422
  Bottom Layer w0.2: v1(63.226,80.498) 63.334,80.498 63.695,80.137 64.008,80.137 67.85,83.979 67.85,84.741 68.18,85.071 68.18,88.832 68.58,89.232 v1(68.58,89.281)
D9: XP2.23 XS3.1 | length 85.2
  Top Layer w0.2: XP2.23@75.007,52.197 75.007,57.227 XS3.1@75.057,57.277 73.987,58.347 73.987,59.475 71.34,62.122 61.449,62.122 61.147,62.424 61.147,70.945 59.868,72.224 59.868,75.767 57.531,78.104 57.531,78.387 56.509,79.409 56.509,82.841 56.45,82.9 56.45,83.342 55.291,84.501 55.291,88.854 55.245,88.9 55.245,94.869 55.753,95.377 69.32,95.377 69.593,95.65 75.995,95.65 76.45,95.195 76.45,88.422
D10: XP2.25 XS3.2 | length 85.9
  Top Layer w0.2: XP2.25@72.467,52.197 72.492,52.222 72.492,57.252 XS3.2@72.517,57.277 73.587,58.347 73.587,59.309 71.174,61.722 61.283,61.722 60.747,62.258 60.747,70.779 59.468,72.058 59.468,75.484 57.131,77.821 57.131,78.221 56.109,79.243 56.109,82.675 56.05,82.734 56.05,83.176 54.891,84.335 54.891,88.617 54.845,88.663 54.845,95.035 55.587,95.777 69.154,95.777 69.548,96.171 74.552,96.171 74.555,96.173 74.837,96.173 v1(74.914,96.25) ; v1(74.93,94.361) 74.299,93.73 74.299,91.817 74.7,91.416 74.7,91.035 75.1,90.635 75.1,89.839 74.95,89.689 74.95,88.422
  Bottom Layer w0.2: v1(74.914,96.25) 74.914,96.155 74.883,96.124 74.883,94.408 v1(74.93,94.361)
D11: R8.2 XP2.27 XP2.28 XS3.3 | length 108.5
  Top Layer w0.2: v1(56.531,77.973) 56.531,77.738 59.068,75.201 59.068,71.892 60.347,70.613 60.347,62.093 61.169,61.271 67.746,61.271 68.907,60.11 68.907,58.347 XS3.3@69.977,57.277 69.952,57.252 69.952,49.682 XP2.28@69.927,49.657 ; v1(60.868,78.394) 61.868,77.394 61.868,73.318 62.523,72.663 62.942,72.244 79.659,72.244 80.01,72.595 80.01,72.78 80.01,74.676 80.391,75.057 88.338,75.057 90.551,77.27 90.913,77.27 R8.2@91.475,76.708 ; v1(74.899,92.075) 75.5,91.474 75.5,89.673 75.45,89.623 75.45,88.422
  Bottom Layer w0.2: v1(56.531,77.973) 60.355,77.973 60.776,78.394 v1(60.868,78.394) ; v1@60.914,78.44 60.791,78.563 60.791,78.797 60.725,78.863 60.725,80.214 65.386,84.875 65.386,88.107 68.239,90.96 72.39,90.96 72.644,91.215 72.644,91.821 72.898,92.075 v1(74.899,92.075)
D12: XP2.29 XP2.30 XS3.4 | length 107.6
  Top Layer w0.2: XP2.30@67.387,49.657 67.412,49.682 67.412,52.197 67.412,57.252 XS3.4@67.437,57.277 68.507,58.347 68.507,59.944 67.58,60.871 61.003,60.871 59.947,61.927 59.947,70.448 58.668,71.727 58.668,74.918 55.709,77.877 55.709,82.509 55.65,82.568 55.65,83.011 54.491,84.17 54.491,88.334 54.445,88.38 54.445,95.2 55.422,96.177 68.989,96.177 69.383,96.571 74.386,96.571 74.486,96.671 74.486,96.733 74.803,97.049 77.264,97.049 80.118,94.195 80.118,90.593 81.652,89.059 88.021,89.059 88.138,88.942 88.138,86.677 87.884,86.423 v1(87.884,86.42) ; 80.675,85.197 86.34,85.197 86.517,85.02 87.736,85.02 87.996,84.76 v1(88.104,84.76)
  Bottom Layer w0.2: v1(87.884,86.42) 87.884,86.312 88.104,86.092 v1(88.104,84.76)
D13: XP2.31 XP2.32 XS3.5 | length 103.6
  Top Layer w0.2: XP2.32@64.847,49.657 64.872,49.682 64.872,52.197 64.872,57.252 XS3.5@64.897,57.277 63.827,58.347 63.827,59.548 62.904,60.471 60.837,60.471 59.547,61.761 59.547,70.282 58.268,71.561 58.268,74.636 55.309,77.594 55.309,82.344 55.25,82.403 55.25,82.845 54.091,84.004 54.091,88.051 54.045,88.098 54.045,95.366 55.256,96.577 68.823,96.577 69.217,96.971 74.157,96.971 74.636,97.449 77.43,97.449 80.518,94.361 80.518,90.759 81.818,89.459 88.367,89.459 88.538,89.288 88.538,86.165 88.193,85.82 87.575,85.82 87.198,86.197 80.675,86.197
D14: XP2.33 XP2.34 XS3.6 | length 105.6
  Top Layer w0.2: XP2.34@62.307,49.657 62.332,49.682 62.332,52.197 62.332,57.252 XS3.6@62.357,57.277 63.427,58.347 63.427,59.382 62.738,60.071 60.672,60.071 59.147,61.596 59.147,70.116 57.868,71.395 57.868,74.353 54.909,77.312 54.909,82.178 54.85,82.237 54.85,82.679 53.691,83.838 53.691,87.769 53.645,87.815 53.645,95.532 55.09,96.977 68.657,96.977 69.051,97.371 73.991,97.371 74.47,97.849 77.595,97.849 80.918,94.527 80.918,90.925 81.984,89.859 88.703,89.859 88.938,89.624 88.938,86 88.358,85.42 87.41,85.42 87.133,85.697 80.675,85.697
D15: XP2.35 XP2.36 XS3.7 | length 90.6
  Top Layer w0.2: XP2.36@59.767,49.657 59.792,49.682 59.792,57.252 XS3.7@59.817,57.277 58.747,58.347 58.747,69.951 57.468,71.23 57.468,74.07 54.509,77.029 54.509,82.012 54.45,82.071 54.45,82.514 53.291,83.673 53.291,87.486 53.245,87.532 53.245,95.697 54.925,97.377 68.492,97.377 68.886,97.771 73.826,97.771 74.304,98.249 77.761,98.249 81.318,94.692 81.318,91.09 81.749,90.659 82.604,90.659 v1(82.804,90.459) ; 79.45,88.422 79.45,89.766 v1(79.6,89.916)
  Bottom Layer w0.2: v1(79.6,89.916) 79.4,90.116 79.4,90.551 79.527,90.678 81.534,90.678 81.553,90.659 82.604,90.659 v1(82.804,90.459)
D16: XP2.37 XP2.38 XS3.8 | length 91.9
  Top Layer w0.2: XP2.38@57.227,49.657 57.252,49.682 57.252,57.252 XS3.8@57.277,57.277 58.347,58.347 58.347,69.785 57.068,71.064 57.068,73.787 54.109,76.746 54.109,79.818 54.05,79.878 54.05,82.348 52.891,83.507 52.891,87.203 52.845,87.249 52.845,95.863 54.759,97.777 68.326,97.777 68.72,98.171 73.66,98.171 74.138,98.649 77.927,98.649 81.718,94.858 81.718,91.256 81.915,91.059 82.604,91.059 v1(82.804,91.259) ; v1(78.8,89.916) 78.95,89.766 78.95,88.422
  Bottom Layer w0.2: v1(78.8,89.916) 79,90.116 79,90.717 79.361,91.078 82.623,91.078 v1(82.804,91.259)
D17: R6.2 | length 20.5
  Top Layer w0.2: 80.675,83.697 80.679,83.693 v1(82.296,83.693) ; v1@82.442,73.914 v1(82.55,73.914) 82.658,73.914 82.966,74.222 90.913,74.222 R6.2@91.475,73.66
  Bottom Layer w0.2: v1(82.296,83.693) 82.373,83.616 82.373,83.426 82.423,83.376 82.423,74.231
DM: XS5.2 | length 14.1
  Top Layer w0.2: 120.13,76.66 120.13,76.185 120.18,76.135 120.18,75.342 120.504,75.018 120.504,69.865 121.627,68.742 125.702,68.742 125.902,68.542 XS5.2@127.102,68.542
DP: R26.1 XS5.3 | length 25.8
  Top Layer w0.2: 120.63,76.66 120.63,76.185 120.58,76.135 120.58,75.508 120.904,75.184 120.904,70.031 121.793,69.142 125.702,69.142 125.902,69.342 XS5.3@127.102,69.342 128.651,69.342 128.778,69.215 128.778,66.548 128.651,66.421 R26.1@120.869,66.421